# Altium PCB PCB1.PcbDoc (part 1 of 6)
Units mil, origin at the board's own origin, x right, y up, seen from the top; angles counter-clockwise.
Board outline 1280 x 1960 mil, 2 copper layers (Top Layer, Bottom Layer); 45 components, 63 nets, 326 pads, 83 vias.
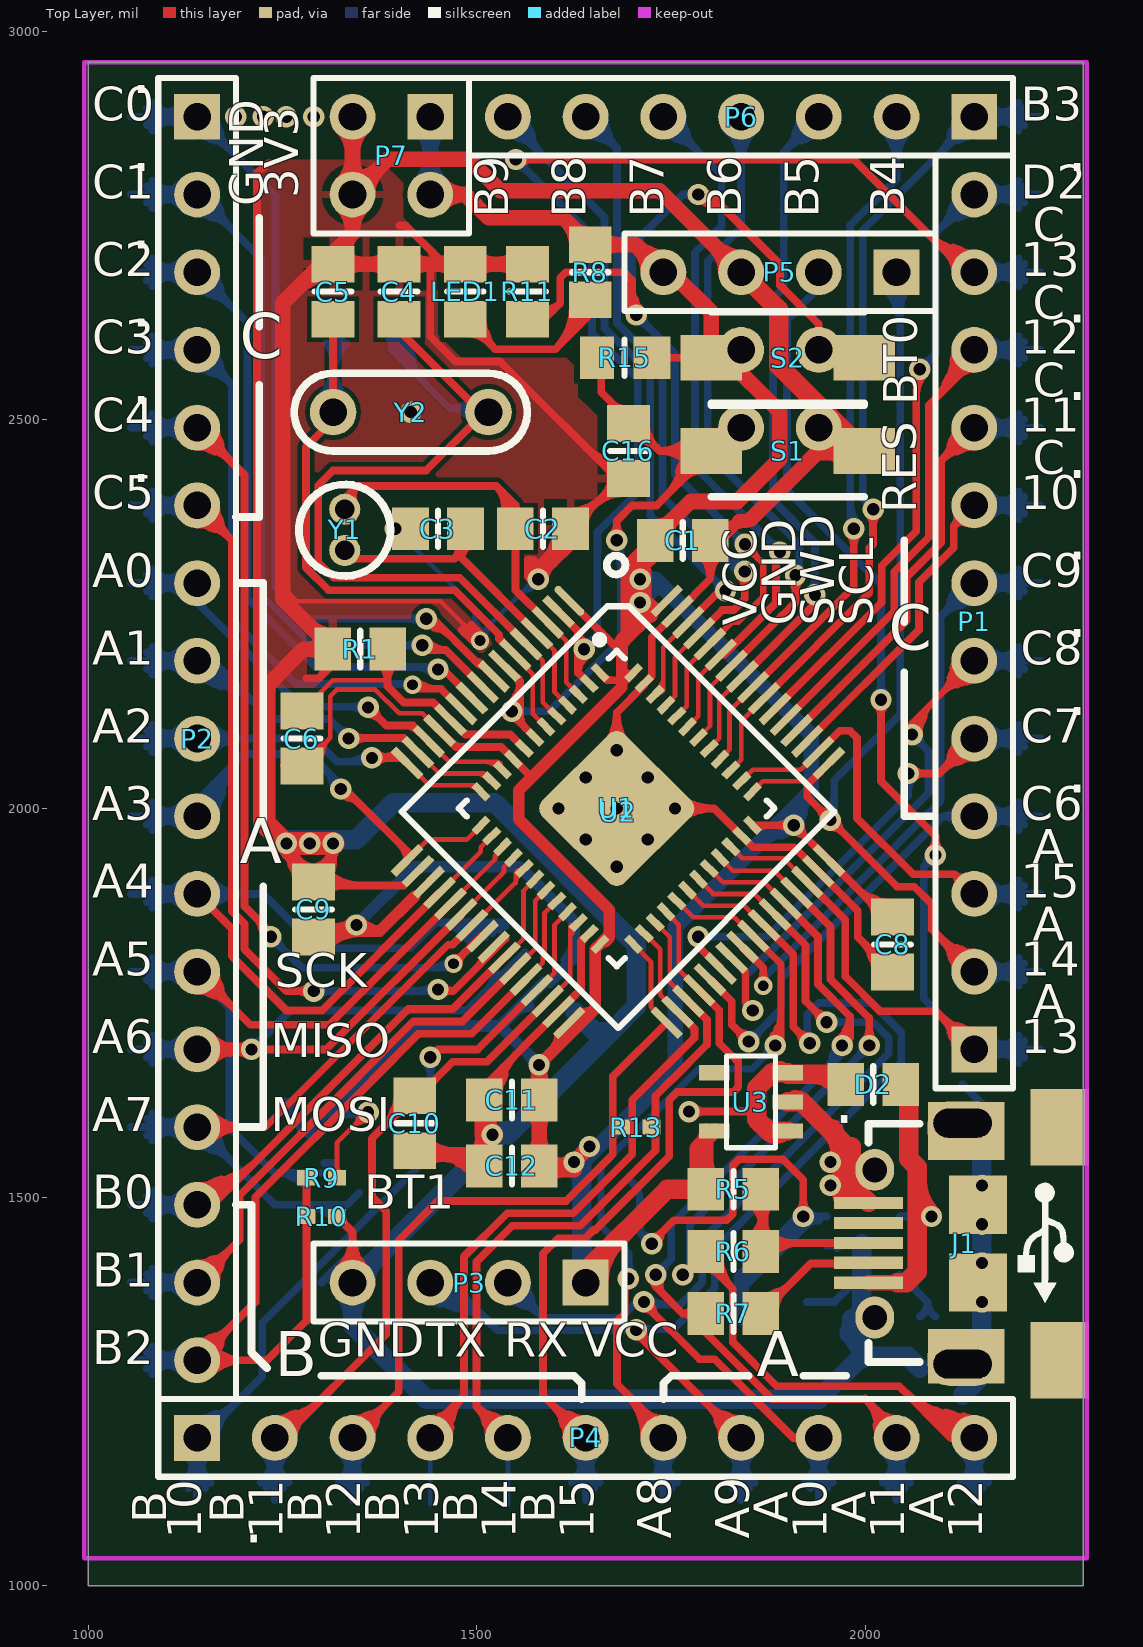
[diagram p0: Top Layer view]
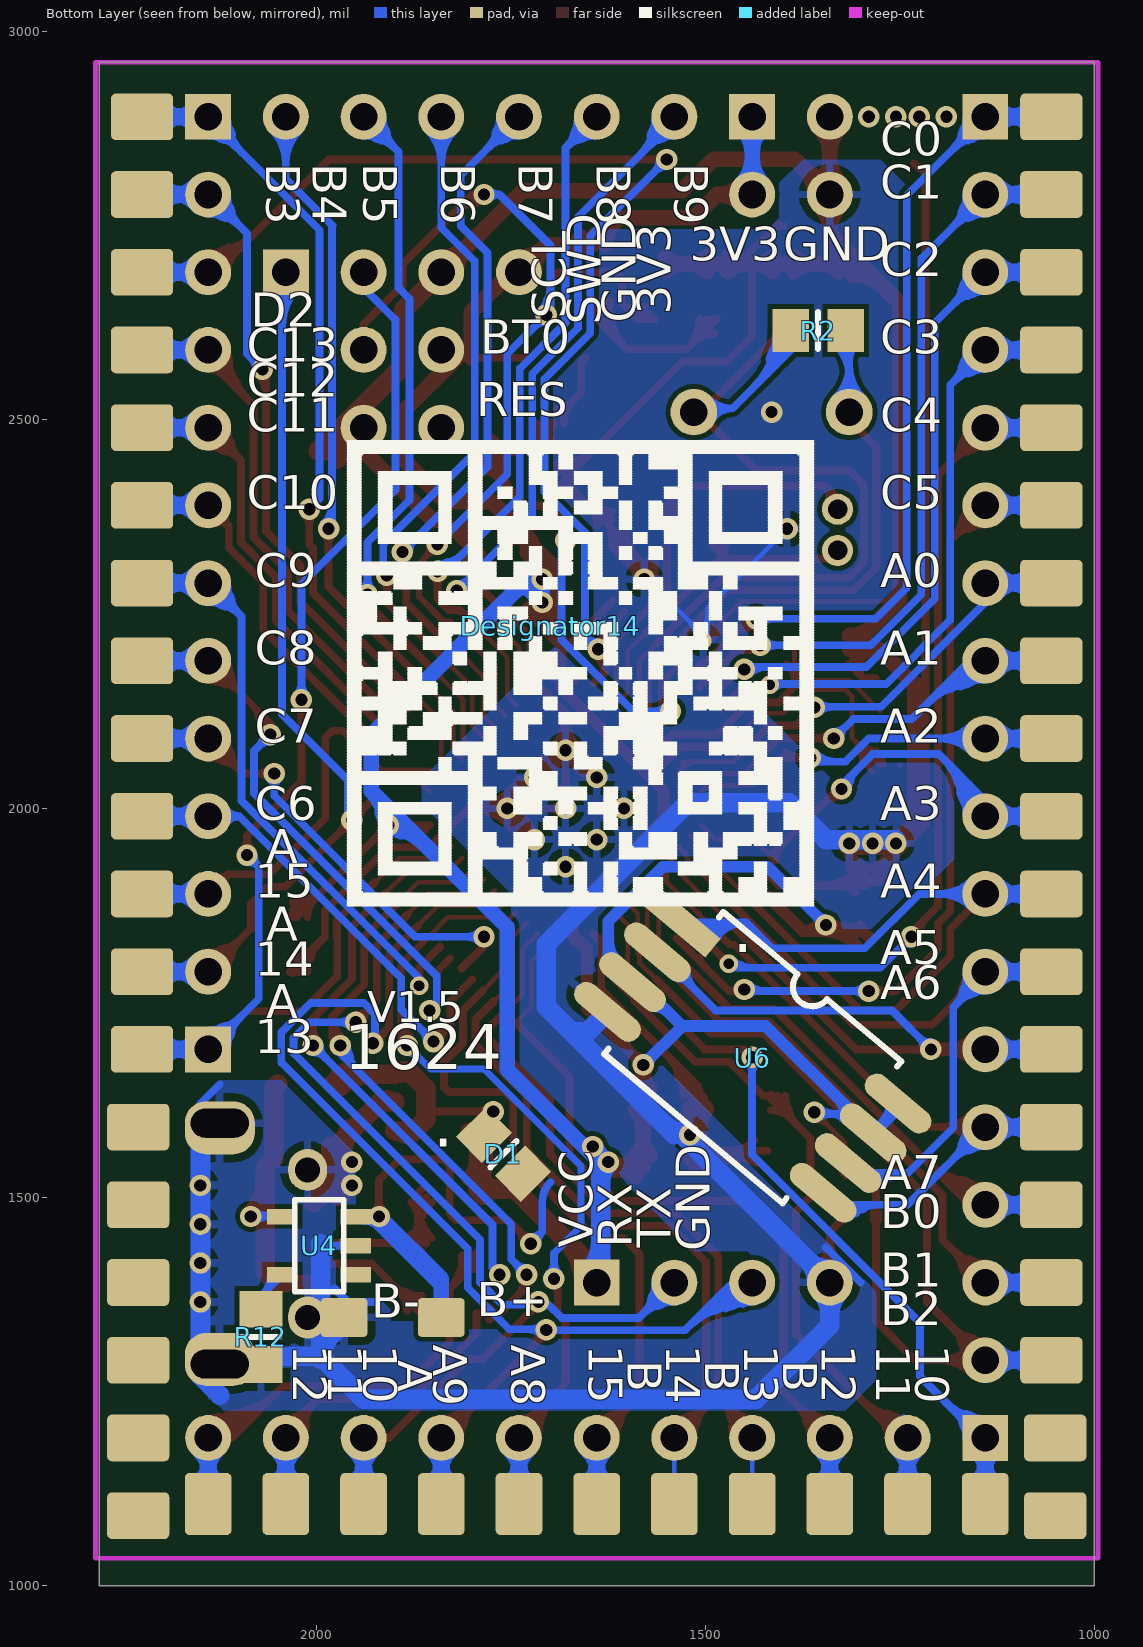
[diagram p1: Bottom Layer view, seen from below]

## Layer stack, top to bottom
Top Solder: solder mask 0.4, Solder Resist, Dk 3.5
Top Layer: signal copper 1.4
Dielectric 1: dielectric 12.6, FR-4, Dk 4.8
Bottom Layer: signal copper 1.4
Bottom Solder: solder mask 0.4, Solder Resist, Dk 3.5

## Board outline
1000,1000 2280,1000 2280,2960 1000,2960

## Design rules (kind name [scope] priority, off if disabled: settings)
Clearance [All] p1: gap=6
PolygonConnect [All] p1: connectstyle=Relief reliefconductorwidth=10 reliefentries=4 polygonreliefangle="90 Angle" airgapwidth=10
RoutingVias [All] p1: holewidth=15.75 width=27.56 viastyle="Through Hole" minholewidth=11.81 minwidth=23.62 maxholewidth=28 maxwidth=50
SolderMaskExpansion [All] p1: expansion=4
Width [All] p1: maxlimit=30 minlimit=6 preferedwidth=8
29 further rules are at their usual default settings.

## Classes and differential pairs
component class stm32: C1 C2 C3 C4 C5 C6 C8 C9 C10 C12 C16 D1 D2 J4 LED1 P1 P2 P3 P4 P5 P6 P7 R1 R5 R6 R7 R8 R9 R10 R11 R12 R15 S1 U1 U2 U3 U4 U6 U7 U10 Y1 Y2

## Components (designator, comment, footprint, x,y, rotation, side; value= is the part's Value field where it differs from the comment)
C1 "Cap" 6-0805_N#1 1765,2345 r0 top
C2 "Cap" 6-0805_N#1 1585,2360 r180 top
C3 "Cap" 6-0805_N#1 1450,2360 r0 top
C4 "Cap" 6-0805_N#1 1400,2665 r270 top
C5 "Cap" 6-0805_N#1 1315,2665 r270 top
C6 "Cap" 6-0805_N#1 1275,2090 r90 top
C8 "Cap" 6-0805_N#1 2035,1825 r270 top
C9 "Cap" 6-0805_N#1 1290,1870 r90 top
C10 "Cap" 6-0805_N#1 1420,1595 r90 top
C11 "Cap" 6-0805_N#1 1545,1625 r180 top
C12 "Cap" 6-0805_N#1 1545,1540 r180 top
C16 "Cap" 6-0805_N#1 1695,2460 r270 top
D1 "Diode" 6-0805_N#1 1760,1555 r45 bottom
D2 "Diode" 6-0805_N#1 2010,1645 r180 top
Designator14 "Comment" 二维码 1700,2235 r180 bottom
J1 "USB_M" 超级usb 2145,1440 r270 top
LED1 "LED" 6-0805_N#1 1485,2665 r90 top
P1 "Header 12" HDR1X12 2140,1690 r90 top
P2 "Header 17" HDR1X17 1140,2890 r270 top
P3 "Header 4" HDR1X4 1640,1390 r180 top
P4 "Header 11" HDR1X11 1140,1190 r0 top
P5 "Header 4" HDR1X4 2040,2690 r180 top
P6 "Header 7" HDR1X7 2140,2890 r180 top
P7 "Header 2X2" HDR2X2 1440,2890 r180 top
R1 "0" 6-0805_N#1 1350,2205 r180 top
R2 "Res2" 6-0805_N#1 1355,2615 r180 bottom
R5 "Res2" 6-0805_N#1 1830,1510 r180 top
R6 "Res2" 6-0805_N#1 1830,1430 r0 top
R7 "Res2" 6-0805_N#1 1830,1350 r0 top
R8 "Res2" 6-0805_N#1 1645.87,2690 r270 top
R9 "Res2" 0402 1300.31,1525 r180 top
R10 "Res2" 0402 1300.31,1475 r180 top
R11 "Res2" 6-0805_N#1 1565,2665 r90 top
R12 "Res2" 6-0805_N#1 2072,1320 r90 bottom
R13 "Res2" 0402 1705,1590 r180 top (schematic designator R10)
R15 "Res2" 6-0805_N#2 1690,2580 r180 top
S1 "SW-PB" key 1900,2460 r180 top
S2 "SW-PB" key 1900,2580 r180 top
U1 "stm32f401ccu6" qfn48精简 1680,2000 r315 top
U2 "STM32F103RCT6" lqfd64正常 1665,1995 r315 top
U3 "ldo3.3v" sot23_5 1850,1625 r270 top
U4 "充电管理" sot23_5 2000,1440 r270 bottom
U6 "25Q32" sop8_w_f 1440,1680 r220 bottom
Y1 "33.768K" XTAL_32.768 1330,2385 r270 top
Y2 "8M" 晶振2 1415,2510 r0 top

## Footprints (in the part's own frame and the unit in brackets; to place one, negate y for a bottom-side part, rotate by r counter-clockwise, add the part's x,y. Pads: shape width x height; smd on the part's side, far side on the other; paste and mask are expansions set on the pad)
6-0805_N#1 [mm] "Chip Resistor, Body 2.0x1.2mm, IPC Medium Density"
  rect 1.2x1.4 smd: 1(-0.9,0) 2(0.9,0)
  silkscreen extent 0,-0.6 0,0.6, body extent -1.07,-0.7 1.07,0.7, height 0.7
6-0805_N#2 [mm] "Chip Resistor, Body 2.0x1.2mm, IPC Medium Density"
  rect 1.2x1.4 smd: 1(-0.9,0)
  rect 1.1x1.4 smd: 2(0.9,0)
  silkscreen extent 0,-0.6 0,0.6, body extent -1.07,-0.7 1.07,0.7, height 0.7
0402 [mm] "Chip Capacitor, Body 1.0x0.5mm, IPC High Density"
  rect 0.6x0.5 smd: 1(-0.5,0) 2(0.5,0)
  body extent -0.55,-0.3 0.55,0.3, height 1.3
HDR1X4 [mm] "Connector; Header; 4 Position"
  rect 1.5x1.5 hole 0.9: 1(0,0)
  round 1.5 hole 0.9: 2(2.54,0) 3(5.08,0) 4(7.62,0)
  silkscreen extent -1.27,-1.27 8.89,1.27
HDR1X7 [mm] "Connector; Header; 7 Position"
  rect 1.5x1.5 hole 0.9: 1(0,0)
  round 1.5 hole 0.9: 2(2.54,0) 3(5.08,0) 4(7.62,0) 5(10.16,0) 6(12.7,0) 7(15.24,0)
  silkscreen extent -1.27,-1.27 16.51,1.27
HDR1X11 [mm] "Connector; Header; 11 Position"
  rect 1.5x1.5 hole 0.9: 1(0,0)
  round 1.5 hole 0.9: 2(2.54,0) 3(5.08,0) 4(7.62,0) 5(10.16,0) 6(12.7,0) 7(15.24,0) 8(17.78,0) 9(20.32,0) 10(22.86,0) 11(25.4,0)
  silkscreen extent -1.27,-1.27 26.67,1.27
HDR1X12 [mm] "Connector; Header; 12 Position"
  rect 1.5x1.5 hole 0.9: 1(0,0)
  round 1.5 hole 0.9: 2(2.54,0) 3(5.08,0) 4(7.62,0) 5(10.16,0) 6(12.7,0) 7(15.24,0) 8(17.78,0) 9(20.32,0) 10(22.86,0) 11(25.4,0) 12(27.94,0)
  silkscreen extent -1.27,-1.27 29.21,1.27
HDR1X17 [mm] "Connector; Header; 17 Position"
  rect 1.5x1.5 hole 0.9: 1(0,0)
  round 1.5 hole 0.9: 2(2.54,0) 3(5.08,0) 4(7.62,0) 5(10.16,0) 6(12.7,0) 7(15.24,0) 8(17.78,0) 9(20.32,0) 10(22.86,0) 11(25.4,0) 12(27.94,0) 13(30.48,0) 14(33.02,0) 15(35.56,0) 16(38.1,0) 17(40.64,0)
  silkscreen extent -1.27,-1.27 41.91,1.27
HDR2X2 [mm] "Connector; Header; 2x2 Position"
  rect 1.5x1.5 hole 0.9: 1(0,0)
  round 1.5 hole 0.9: 2(0,2.54) 3(2.54,0) 4(2.54,2.54)
  silkscreen extent -1.27,-1.27 3.81,3.81
key [mm]
  rect 2x1.5 smd: 1(-2.5,0) 2(2.5,0)
  silkscreen extent -2.5,-1.5 2.5,1.5
lqfd64正常 [mil]
  oval 50x10 smd: 1(-225,160)
  rect 50x10 smd: 2(-225,140.31) 3(-225,120.63) 4(-225,100.94) 5(-225,81.26) 6(-225,61.57) 7(-225,41.89) 8(-225,22.2) 9(-225,2.52) 10(-225,-17.17) 11(-225,-36.85) 12(-225,-56.54) 13(-225,-76.22) 14(-225,-95.91) 15(-225,-115.59) 16(-225,-135.28) 33(247.44,-135.28) 34(247.44,-115.59) 35(247.44,-95.91) 36(247.44,-76.22) 37(247.44,-56.54) 38(247.44,-36.85) 39(247.44,-17.17) 40(247.44,2.52) 41(247.44,22.2) 42(247.44,41.89) 43(247.44,61.57) 44(247.44,81.26) 45(247.44,100.94) 46(247.44,120.63) 47(247.44,140.31) 48(247.44,160)
  rect 10x50 smd: 17(-136.42,-223.86) 18(-116.73,-223.86) 19(-97.05,-223.86) 20(-77.36,-223.86) 21(-57.68,-223.86) 22(-37.99,-223.86) 23(-18.31,-223.86) 24(1.38,-223.86) 25(21.06,-223.86) 26(40.75,-223.86) 27(60.43,-223.86) 28(80.12,-223.86) 29(99.8,-223.86) 30(119.49,-223.86) 31(139.17,-223.86) 32(158.86,-223.86) 49(158.86,248.58) 50(139.17,248.58) 51(119.49,248.58) 52(99.8,248.58) 53(80.12,248.58) 54(60.43,248.58) 55(40.75,248.58) 56(21.06,248.58) 57(1.38,248.58) 58(-18.31,248.58) 59(-37.99,248.58) 60(-57.68,248.58) 61(-77.36,248.58) 62(-97.05,248.58) 63(-116.73,248.58) 64(-136.42,248.58)
  silkscreen extent -227,-184 208,247
qfn48精简 [mm]
  rect 0.65x0.25 smd: 1(-3.525,2.75) 2(-3.525,2.25) 3(-3.525,1.75) 4(-3.525,1.25) 5(-3.525,0.75) 6(-3.525,0.25) 7(-3.525,-0.25) 8(-3.525,-0.75) 9(-3.525,-1.25) 10(-3.525,-1.75) 11(-3.525,-2.25) 12(-3.525,-2.75) 25(3.525,-2.75) 26(3.525,-2.25) 27(3.525,-1.75) 28(3.525,-1.25) 29(3.525,-0.75) 30(3.525,-0.25) 31(3.525,0.25) 32(3.525,0.75) 33(3.525,1.25) 34(3.525,1.75) 35(3.525,2.25) 36(3.525,2.75)
  rect 0.25x0.65 smd: 13(-2.75,-3.525) 14(-2.25,-3.525) 15(-1.75,-3.525) 16(-1.25,-3.525) 17(-0.75,-3.525) 18(-0.25,-3.525) 19(0.25,-3.525) 20(0.75,-3.525) 21(1.25,-3.525) 22(1.75,-3.525) 23(2.25,-3.525) 24(2.75,-3.525) 37(2.75,3.525) 38(2.25,3.525) 39(1.75,3.525) 40(1.25,3.525) 41(0.75,3.525) 42(0.25,3.525) 43(-0.25,3.525) 44(-0.75,3.525) 45(-1.25,3.525) 46(-1.75,3.525) 47(-2.25,3.525) 48(-2.75,3.525)
  silkscreen extent -4.42,-3.65 3.65,3.65
sop8_w_f [mm]
  rect 2.6x0.8 smd: 1(-4.572,1.905)
  oval 2.6x0.8 smd: 2(-4.572,0.635) 3(-4.572,-0.635) 4(-4.572,-1.905) 5(4.628,-1.905) 6(4.628,-0.635) 7(4.628,0.635) 8(4.628,1.905)
  silkscreen extent -3.77,-3.03 3.83,3.02
sot23_5 [mm]
  rect 0.5x1 smd: 1(1.016,1.27) 2(0.066,1.27) 3(-0.884,1.27) 4(-0.884,-1.13) 5(1.016,-1.13)
  silkscreen extent -1.43,-0.73 1.57,0.87, body extent -1.38,-1.33 1.52,1.47, height 1.09
XTAL_32.768 [mil] "32.768k柱式晶振（未加焊）"
  round 40 hole 25: 1(0,0) 2(53,0)
  silkscreen extent -32,-59 86,59, body extent -33,-59 85,59, height 354
二维码 [mil]
  silkscreen extent -261,-360 339,238
晶振2 [mil]
  round 60 hole 35.43: 1(100,0) 2(-100,0)
  silkscreen extent -150,-50 150,50
超级usb [mil]
  rect 98.43x75 smd: 0(-150,105) 0(150,105)
  rect 15.75x88.58 smd: 1(50.18,-140.87) 2(24.59,-140.87) 3(-1,-140.87) 4(-52.18,-140.87) 5(-26.59,-140.87)
  rrect80% 68x90 hole 37 slot 75 at 90 deg copper offset 6,0 mask+0: 4(-155,-20)
  rect 75x98.43 smd: 4(-145,-15)
  oval 54x50 hole 32 mask+0: 4(-95,-133) 4(95,-133)
  round 27.56 hole 15.75: 4(-75,5) 4(-25,5) 4(25,5) 4(75,5)
  rect 74.8x74.8 smd: 4(-50,0) 4(50,0)
  rect 70x98.43 smd: 4(145,-15)
  rrect80% 68x90 hole 37 slot 75 at 90 deg copper offset -6,0 mask+0: 4(155,-20)
  silkscreen extent -154,-141 152,123

## Part data
C1 C2 C3 C4 C5 C6 C8 C9 C10 C11 C12 C16: "Capacitor"
D1 D2: "Default Diode"
LED1: library part 发光二极管
P1: "Header, 12-Pin"
P2: "Header, 17-Pin"
P3 P5: "Header, 4-Pin"
P4: "Header, 11-Pin"
P6: "Header, 7-Pin"
P7: "Header, 2-Pin, Dual row"
R1: library part Res2, "Resistor"
R2 R5 R6 R7 R8 R9 R10 R11 R12 R13 R15: "Resistor"
S1 S2: "Switch"
U1 U3 U4 U6: library part Component_1
U2: library part STM32F103RDT6, "ST High-density performance line ARM-based 32-bit MCU with 256 to  512KB Flash, USB, CAN, 11 timers, 3 ADCs, 13 communication interfaces"
Y1 Y2: library part 晶振

## Free pads (board coordinates)
  round 59 hole 35.43: 0(1840,2490) 0(1840,2590) 0(1940,2490) 0(1940,2590)
  rrect20% 80x60 smd far side: 1(1050,1090) 1(1050,1190) 1(1055,1290) 1(1055,1390) 1(1055,1490) 1(1055,1590) 1(1055,1690) 1(1055,1790) 1(1055,1890) 1(1055,1990) 1(1055,2090) 1(1055,2190) 1(1055,2290) 1(1055,2390) 1(1055,2490) 1(1055,2590) 1(1055,2690) 1(1055,2790) 1(1055,2890) 1(2225,1690) 1(2225,1790) 1(2225,1890) 1(2225,1990) 1(2225,2090) 1(2225,2190) 1(2225,2290) 1(2225,2390) 1(2225,2490) 1(2225,2590) 1(2225,2690) 1(2225,2790) 1(2225,2890) 1(2230,1090) 1(2230,1190) 1(2230,1290) 1(2230,1390) 1(2230,1490) 1(2230,1590)
  rrect20% 60x80 smd far side: 1(1140,1105) 1(1240,1105) 1(1340,1105) 1(1440,1105) 1(1540,1105) 1(1640,1105) 1(1740,1105) 1(1840,1105) 1(1940,1105) 1(2040,1105) 1(2140,1105)
  rrect20% 150x150 smd rot 135: 1(1680,2000)
  rrect20% 60x50 smd far side: 1(1840,1345) 1(1965,1345)

## Via types
v1: diameter 27.56, hole 15.75, Top Layer to Bottom Layer, tented both sides, 79 vias
v2: diameter 23.62, hole 13.78, Top Layer to Bottom Layer, tented both sides, 3 vias
v3: diameter 23.62, hole 13.78, Top Layer to Bottom Layer, tented top, 1 vias

## Nets (pads, with @x,y where several pads share a name; then routed paths per layer and width w, separated by ;. In a path a pad name is that pad's centre, name@x,y a point inside that pad or via, vN(x,y) a via of type N, cw(c..) or ccw(c..) an arc to the next point about the centre after c; other vN are vias at no path point)
BOOT0: pad.0@1940,2590 R11.1 S2.1 U1.44 U2.60 | length 2098.1
  Top Layer w6: U1.44@1757.25,2119.01 1770,2131.76 1770,2181.57 U2.60@1799.99,2211.56
  Top Layer w8: U2.60@1799.99,2211.56 1828.65,2240.22 1836.48,2240.22 1868.56,2272.3 1868.56,2314.85 1845,2338.41 v1(1845,2340) ; v1@1845,2330.22 cw(c1845,2310.45) 1858.98,2324.43 ccw(c1845,2310.45) v1@1845,2330.22 ; v1@1854.78,2340 ccw(c1882.23,2340) 1862.82,2320.59 cw(c1882.23,2340) v1@1854.78,2340
  Top Layer w10: R11.1@1565,2629.57 1586.88,2629.57 1607.31,2650 ; v1@1700.25,2642.38 ccw(c1695.18,2650.25) 1703.29,2654.93 ; v1(1705,2635) 1699.47,2640.53 1699.47,2680 1689.47,2690 1614.56,2690 1607.31,2682.74 1607.31,2650 ; v1@1783.94,2789.39 ccw(c1806.47,2802.39) 1799.73,2777.27 ; v1(1785,2790) 1800,2790 ; v1@1791.98,2784.67 cw(c1797.77,2780.25) 1799.66,2787.29 cw(c1802.13,2796.52) v1@1793.21,2793.12 ; pad.0@1940,2590 1940,2623.23 1890,2673.23 1890,2700 1800,2790 ; 1607.31,2650 cw(c1589.88,2667.42) 1577.95,2645.86 ccw(c1589.88,2667.42) 1607.31,2650 ; 1800,2790 cw(c1800,2798.42) 1792.66,2794.3 ccw(c1800,2798.42) 1800,2790 ; 1800,2790 ccw(c1800,2781.58) 1792.66,2785.7 cw(c1800,2781.58) 1800,2790 ; R11.1@1573.11,2637.11 ccw(c1583.19,2655.33) 1597.92,2640.61 cw(c1583.19,2655.33) R11.1@1573.11,2637.11 ; 1699.47,2669.54 ccw(c1739.54,2669.54) 1711.21,2641.21 cw(c1739.54,2669.54) 1699.47,2669.54 ; v1@1785,2781.22 cw(c1785,2723.81) 1825.59,2764.41 ccw(c1785,2723.81) v1@1785,2781.22 ; v1@1785,2791.22 cw(c1785,2757.95) 1808.52,2781.48 ccw(c1785,2757.95) v1@1785,2791.22
  Bottom Layer w10: v1@1700.25,2642.38 ccw(c1695.18,2650.25) 1703.29,2654.93 ; v1(1785,2790) 1765,2790 ; v1(1845,2340) 1755,2430 1755,2585 v1(1705,2635) 1699.47,2640.53 1699.47,2724.47 1765,2790 ; 1719.99,2620.01 cw(c1734.98,2635) 1713.78,2635 ccw(c1734.98,2635) 1719.99,2620.01 ; 1719.99,2620.01 ccw(c1705,2605.02) 1705,2626.22 cw(c1705,2605.02) 1719.99,2620.01 ; 1765,2790 cw(c1765,2771.61) 1778.54,2784.06 ccw(c1765,2771.61) 1765,2790 ; 1765,2790 ccw(c1765,2808.39) 1778.54,2795.94 cw(c1765,2808.39) 1765,2790 ; 1830.01,2354.99 cw(c1815.02,2340) 1836.22,2340 ccw(c1815.02,2340) 1830.01,2354.99 ; 1830.01,2354.99 ccw(c1845,2369.98) 1845,2348.78 cw(c1845,2369.98) 1830.01,2354.99 ; 1699.47,2669.54 ccw(c1739.54,2669.54) 1711.21,2641.21 cw(c1739.54,2669.54) 1699.47,2669.54
BOOT1: P2.17 pad.1@1055,1290 R9.2 R10.2 U1.20 U2.28 | length 2972
  Top Layer w6: U2.28@1563.36,1780.06 1585,1801.7 1585,1810.57 1587,1812.57 1587,1865.24 U1.20@1602.75,1880.99
  Top Layer w10: P2.17@1134.64,1291.1 cw(c1172.3,1283.39) 1162.35,1320.52 ; P2.17@1141.1,1284.64 ccw(c1133.39,1322.3) 1170.52,1312.35 ; R9.2@1280.63,1525 R10.2@1280.63,1475 1280.63,1340.63 1230,1290 P2.17@1140,1290 1215,1365 1215,1499.75 1365,1649.75 1365,1650 1425,1710 1493.3,1710 U2.28@1563.36,1780.06 ; 1164.8,1314.8 cw(c1140,1339.6) 1140,1304.53 ccw(c1140,1339.6) 1164.8,1314.8 ; 1164.8,1314.8 ccw(c1189.6,1290) 1154.53,1290 cw(c1189.6,1290) 1164.8,1314.8 ; 1175.07,1290 cw(c1175.07,1325.07) 1150.27,1300.27 ccw(c1175.07,1325.07) 1175.07,1290 ; 1175.07,1290 ccw(c1175.07,1254.93) 1150.27,1279.73 cw(c1175.07,1254.93) 1175.07,1290 ; 1181.87,1331.87 cw(c1140,1373.74) 1140,1314.53 ccw(c1140,1373.74) 1181.87,1331.87 ; 1181.87,1331.87 ccw(c1223.74,1290) 1164.53,1290 cw(c1223.74,1290) 1181.87,1331.87 ; 1199.21,1290 cw(c1199.21,1349.21) 1157.34,1307.34 ccw(c1199.21,1349.21) 1199.21,1290 ; 1199.21,1290 ccw(c1199.21,1230.79) 1157.34,1272.66 cw(c1199.21,1230.79) 1199.21,1290 ; 1280.63,1463.31 cw(c1292.32,1463.31) 1284.05,1471.58 ccw(c1292.32,1463.31) 1280.63,1463.31 ; 1280.63,1463.31 ccw(c1268.94,1463.31) 1277.2,1471.58 cw(c1268.94,1463.31) 1280.63,1463.31 ; 1280.63,1486.69 cw(c1268.94,1486.69) 1277.2,1478.42 ccw(c1268.94,1486.69) 1280.63,1486.69 ; 1280.63,1486.69 ccw(c1292.32,1486.69) 1284.05,1478.42 cw(c1292.32,1486.69) 1280.63,1486.69 ; 1280.63,1513.31 cw(c1292.32,1513.31) 1284.05,1521.58 ccw(c1292.32,1513.31) 1280.63,1513.31 ; 1280.63,1513.31 ccw(c1268.94,1513.31) 1277.2,1521.58 cw(c1268.94,1513.31) 1280.63,1513.31
  Bottom Layer w10: pad.1@1055,1290 P2.17@1140,1290 ; P2.17@1116.78,1282.1 ccw(c1095.78,1274.96) 1101.52,1296.39 ccw(c1105.72,1312.07) P2.17@1119.38,1303.28 ; P2.17@1116.78,1297.9 cw(c1095.78,1305.04) 1101.52,1283.61 cw(c1105.72,1267.93) P2.17@1119.38,1276.72 ; pad.1@1080.79,1290 cw(c1080.79,1230.79) 1122.66,1272.66 ccw(c1080.79,1230.79) pad.1@1080.79,1290 ; pad.1@1080.79,1290 ccw(c1080.79,1349.21) 1122.66,1307.34 cw(c1080.79,1349.21) pad.1@1080.79,1290 ; pad.1@1086.36,1277.01 cw(c1099.56,1268.97) 1103.56,1283.9 ; pad.1@1086.36,1277.01 cw(c1099.56,1268.97) 1103.56,1283.9 ; pad.1@1086.36,1277.01 cw(c1099.56,1268.97) 1103.56,1283.9 ; pad.1@1086.36,1302.99 ccw(c1099.56,1311.03) 1103.56,1296.1 ; pad.1@1086.36,1302.99 ccw(c1099.56,1311.03) 1103.56,1296.1 ; pad.1@1086.36,1302.99 ccw(c1099.56,1311.03) 1103.56,1296.1 ; pad.1@1088.73,1282.12 cw(c1109.12,1275.35) 1103.56,1296.1 ; pad.1@1088.73,1282.12 cw(c1109.12,1275.35) 1103.56,1296.1 ; pad.1@1088.73,1282.12 cw(c1109.12,1275.35) 1103.56,1296.1 ; pad.1@1088.73,1297.88 ccw(c1109.12,1304.65) 1103.56,1283.9 ; pad.1@1088.73,1297.88 ccw(c1109.12,1304.65) 1103.56,1283.9 ; pad.1@1088.73,1297.88 ccw(c1109.12,1304.65) 1103.56,1283.9 ; 1101.21,1290 cw(c1101.21,1326.21) 1075.61,1300.61 ccw(c1101.21,1326.21) 1101.21,1290 ; 1101.21,1290 ccw(c1101.21,1253.79) 1075.61,1279.39 cw(c1101.21,1253.79) 1101.21,1290 ; 1104.93,1290 cw(c1104.93,1254.93) 1129.73,1279.73 ccw(c1104.93,1254.93) 1104.93,1290 ; 1104.93,1290 ccw(c1104.93,1325.07) 1129.73,1300.27 cw(c1104.93,1325.07) 1104.93,1290 ; P2.17@1125.36,1290 cw(c1125.36,1350.36) 1082.68,1307.68 ccw(c1125.36,1350.36) P2.17@1125.36,1290 ; P2.17@1125.36,1290 ccw(c1125.36,1229.64) 1082.68,1272.32 cw(c1125.36,1229.64) P2.17@1125.36,1290
FCS: P2.11 pad.1@1055,1890 U1.14 U2.20 U6.1 | length 2751.3
  Top Layer w6: U2.20@1452,1891.41 1505,1944.41 1505,1950 1519.23,1964.23 U1.14@1519.23,1964.51 ; 1510.19,1955.19 ccw(c1506.44,1958.94) 1511.74,1958.94 cw(c1506.44,1958.94) 1510.19,1955.19
  Top Layer w10: P2.11@1140,1890 1185,1845 1185,1810 1255,1740 1300,1740 1300.3,1739.7 U2.20@1452,1891.41
  Bottom Layer w10: pad.1@1055,1890 P2.11@1140,1890 1225,1890 1295,1820 1413.93,1820 1447.09,1853.16 ; P2.11@1116.78,1882.1 ccw(c1095.78,1874.96) 1101.52,1896.39 ccw(c1105.72,1912.07) P2.11@1119.38,1903.28 ; P2.11@1116.78,1897.9 cw(c1095.78,1905.04) 1101.52,1883.61 cw(c1105.72,1867.93) P2.11@1119.38,1876.72 ; 1474.25,1845.74 ccw(c1490.26,1860.51) U6.1@1498.48,1840.33 ; U6.1@1484.02,1835.14 ccw(c1496.07,1846.25) U6.1@1502.25,1831.07 ; U6.1@1529.68,1853.16 1447.09,1853.16 ; pad.1@1080.79,1890 cw(c1080.79,1830.79) 1122.66,1872.66 ccw(c1080.79,1830.79) pad.1@1080.79,1890 ; pad.1@1080.79,1890 ccw(c1080.79,1949.21) 1122.66,1907.34 cw(c1080.79,1949.21) pad.1@1080.79,1890 ; pad.1@1086.36,1877.01 cw(c1099.56,1868.97) 1103.56,1883.9 ; pad.1@1086.36,1877.01 cw(c1099.56,1868.97) 1103.56,1883.9 ; pad.1@1086.36,1877.01 cw(c1099.56,1868.97) 1103.56,1883.9 ; pad.1@1086.36,1902.99 ccw(c1099.56,1911.03) 1103.56,1896.1 ; pad.1@1086.36,1902.99 ccw(c1099.56,1911.03) 1103.56,1896.1 ; pad.1@1086.36,1902.99 ccw(c1099.56,1911.03) 1103.56,1896.1 ; pad.1@1088.73,1882.12 cw(c1109.12,1875.35) 1103.56,1896.1 ; pad.1@1088.73,1882.12 cw(c1109.12,1875.35) 1103.56,1896.1 ; pad.1@1088.73,1882.12 cw(c1109.12,1875.35) 1103.56,1896.1 ; pad.1@1088.73,1897.88 ccw(c1109.12,1904.65) 1103.56,1883.9 ; pad.1@1088.73,1897.88 ccw(c1109.12,1904.65) 1103.56,1883.9 ; pad.1@1088.73,1897.88 ccw(c1109.12,1904.65) 1103.56,1883.9 ; 1101.21,1890 cw(c1101.21,1926.21) 1075.61,1900.61 ccw(c1101.21,1926.21) 1101.21,1890 ; 1101.21,1890 ccw(c1101.21,1853.79) 1075.61,1879.39 cw(c1101.21,1853.79) 1101.21,1890 ; 1104.93,1890 cw(c1104.93,1854.93) 1129.73,1879.73 ccw(c1104.93,1854.93) 1104.93,1890 ; 1104.93,1890 ccw(c1104.93,1925.07) 1129.73,1900.27 cw(c1104.93,1925.07) 1104.93,1890 ; P2.11@1125.36,1890 cw(c1125.36,1950.36) 1082.68,1907.68 ccw(c1125.36,1950.36) P2.11@1125.36,1890 ; P2.11@1125.36,1890 ccw(c1125.36,1829.64) 1082.68,1872.32 cw(c1125.36,1829.64) P2.11@1125.36,1890 ; 1175.07,1890 cw(c1175.07,1925.07) 1150.27,1900.27 ccw(c1175.07,1925.07) 1175.07,1890 ; 1175.07,1890 ccw(c1175.07,1854.93) 1150.27,1879.73 cw(c1175.07,1854.93) 1175.07,1890 ; 1199.21,1890 cw(c1199.21,1949.21) 1157.34,1907.34 ccw(c1199.21,1949.21) 1199.21,1890 ; 1199.21,1890 ccw(c1199.21,1830.79) 1157.34,1872.66 cw(c1199.21,1830.79) 1199.21,1890 ; 1447.09,1853.16 cw(c1447.09,1801.29) 1493.02,1825.39 ccw(c1447.09,1801.29) 1447.09,1853.16 ; 1463.63,1853.16 cw(c1463.63,1809.97) 1501.87,1830.03 ccw(c1463.63,1809.97) 1463.63,1853.16 ; 1480.17,1853.16 cw(c1480.17,1818.65) 1510.73,1834.68 ccw(c1480.17,1818.65) 1480.17,1853.16 ; 1496.71,1853.16 cw(c1496.71,1827.32) 1519.58,1839.32 ccw(c1496.71,1827.32) 1496.71,1853.16 ; U6.1@1513.25,1853.16 cw(c1513.25,1836) 1528.44,1843.97 ccw(c1513.25,1836) U6.1@1513.25,1853.16 ; U6.1@1529.79,1853.16 cw(c1529.79,1844.67) 1537.29,1848.61 ccw(c1529.79,1844.67) U6.1@1529.79,1853.16